# Altium PCB PCB1.PcbDoc (part 2 of 2)
Units mm, origin at the board's own origin, x right, y up, seen from the top; angles counter-clockwise.
Board outline 152.4 x 101.6 mm, 2 copper layers (Top Layer, Bottom Layer); 142 components, 437 nets, 1185 pads, 0 vias.
Unrouted connection lines stored in the file: 722.
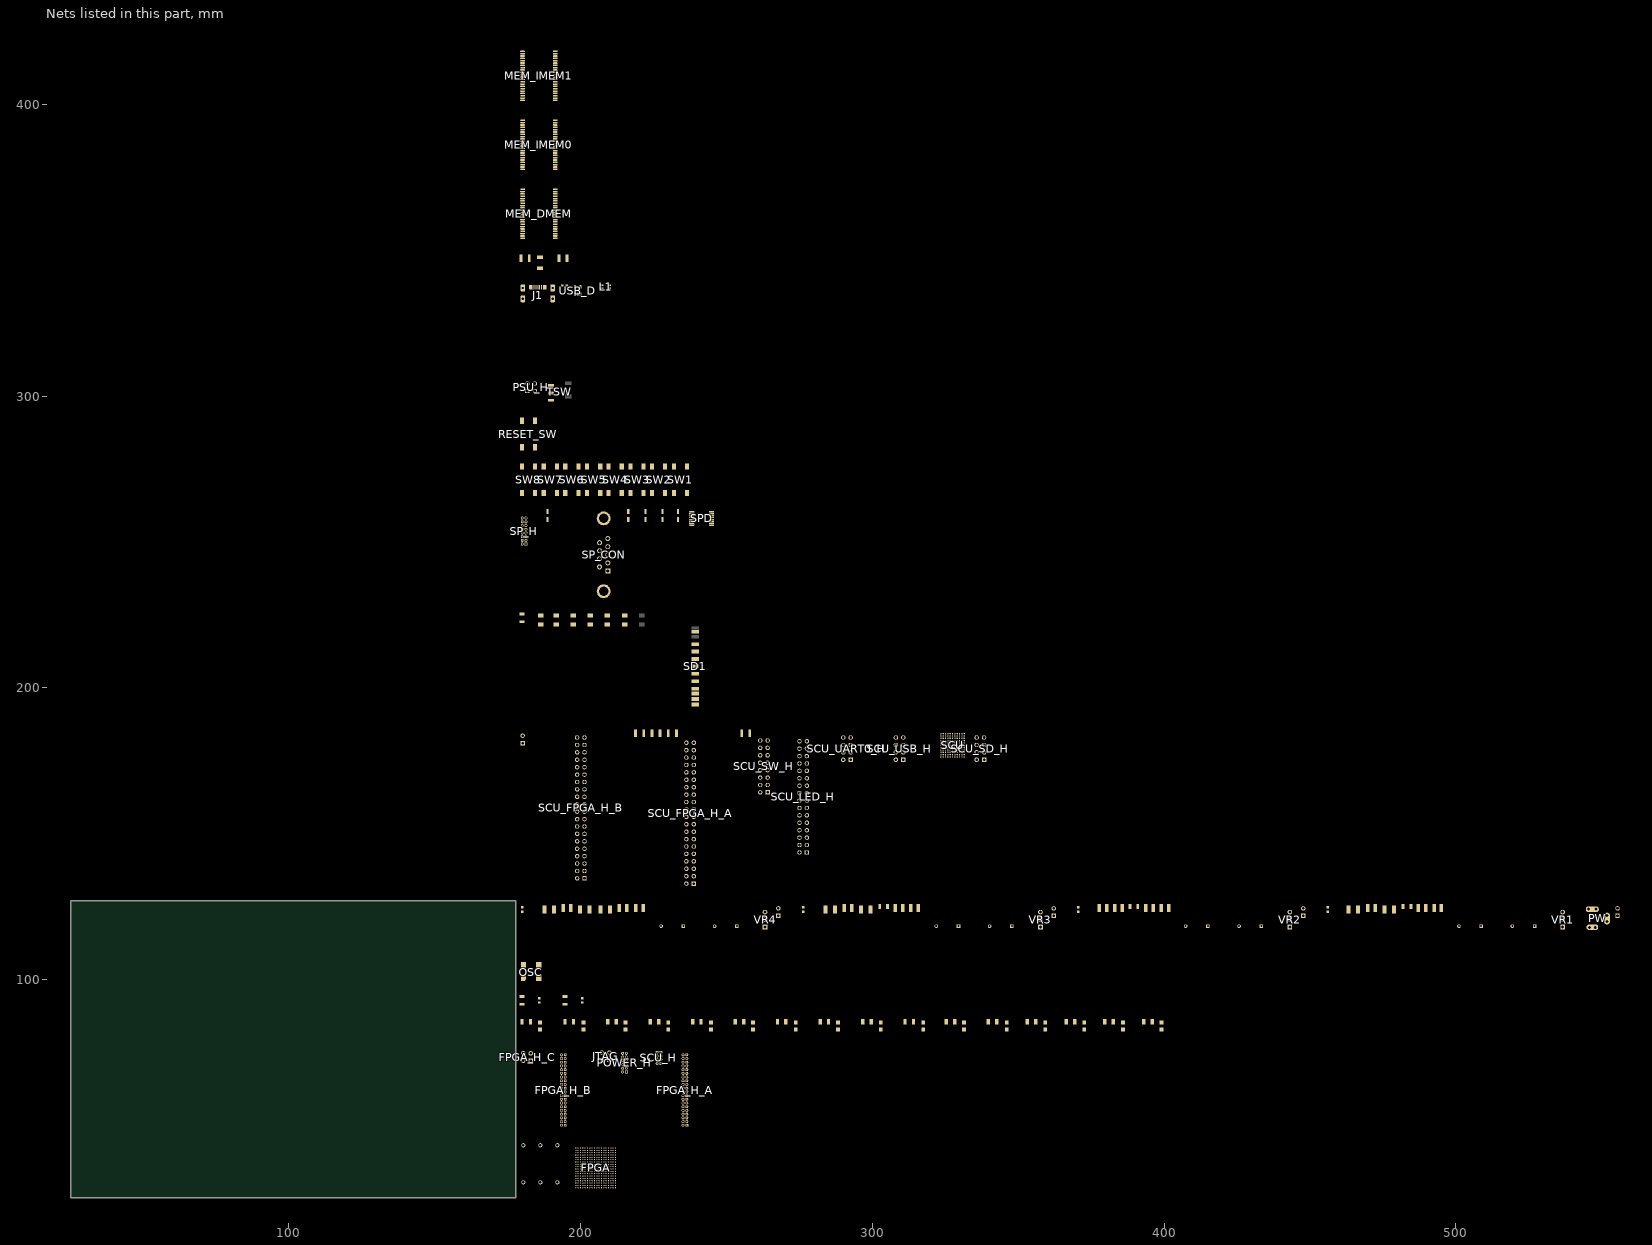
[diagram p2: the nets of this part, all layers, seen from the top]

## Part data
C1 C2 C3 C4 C5 C6 C7 C8 C9 C10 C11 C12 C13: library part CMP-1038-01663-1, "CAP 100nF 100V ±5% 1210 (3225 Metric) Thickness 1.05mm SMD"
C14 C15: library part CMP-1038-00186-1, "CAP 100pF 100V ±1% 1210 (3225 Metric) Thickness 1mm SMD"
C16 C17 C18 C19: library part CMP-1038-00005-1, "CAP 10pF 100V ±0.25pF 1210 (3225 Metric) Thickness 1mm SMD"
CP1 CP2 CP3 CP4 CP5: library part CAP_POL_SIZE_B, "size B series S type V capacitor, panasonic elec"
E1 E2 E3 E4 E5 E6 E7 E8: "Polarized Capacitor (Radial)"
FPGA: "Spartan-6 LX 1.2V FPGA, 218 User I/Os, 324-Ball Chip-Scale BGA (0.8mm Pitch), Speed Grade 2, Industrial Grade, Pb-Free"
FPGA_H_A FPGA_H_B SCU_FPGA_H_A SCU_FPGA_H_B: "Header, 20-Pin, Dual row"
FPGA_H_C JTAG PSU_H: "Header, 2-Pin, Dual row"
J1: library part USB_Micro_TypeB_FCI, "Connector SMD-THD USB Micro Type B middle mount"
L1: library part "WE-CNSW 1206, 744232161", "SMD Common Mode Noise Suppressor WE-CNSW,  Z= 160 Ohm"
L2: library part "WE-CBF 0603, 742792641", "SMD EMI Suppression Ferrite Beads WE-CBF, Z= 300 Ohm"
LED1 LED2 LED3 LED4 LED21 LED22: "High Performance Chip LED, Red"
LED5 LED6 LED7 LED8 LED9 LED10 LED11 LED12 LED13 LED14 LED15 LED16 LED17 LED18 LED19 LED20: "Surface Mount Chip LED, Green"
POWER_H: "Header, 6-Pin, Dual row"
PW: library part PWR2.5, "Low Voltage Power Supply Connector"
PW_H1 PW_H2 PW_H3 PW_H4 SCU_FPGA_H_C: "Header, 2-Pin"
R1 R2 R5 R6 R8 R9 R10: library part CMP-1015-00405-1, "120R 0.5W 1% 1210 (3225 Metric)  SMD"
R3 R4 R7 R37 R38: library part CMP-1014-00056-1, "180R 0.25W 5% 1206 (3216 Metric)  SMD"
R11 R12 R13 R14 R15 R16 R17 R18 R19 R20 R21 R22 R23 R24 R25 R26: library part CMP-1014-00044-1, "56R 0.25W 5% 1206 (3216 Metric)  SMD"
R26 R27 R28 R29 R30 R31 R32: library part CMP-1014-00702-1, "49K9 0.25W 1% 1206 (3216 Metric)  SMD"
R33: library part CMP-1014-00736-1, "100K 0.25W 1% 1206 (3216 Metric)  SMD"
R34 R35 R36: "Semiconductor Resistor"
RESET_SW SW1 SW2 SW3 SW4 SW5 SW6 SW7 SW8: library part switch-button
SCU: library part CMP-0270-00014-1, "EFM32 Giant Gecko, M3 ARM Cortex CPU, 1024 KB Flash, 128 KB RAM, 1.85 - 3.8 V Supply, 48 MHz Max Speed, -40 to 85 degC, 112-Pin BGA, RoHS Compliant"
SCU_H SCU_SD_H SCU_UART0_H SCU_USB_H: "Header, 4-Pin, Dual row"
SCU_LED_H: "Header, 16-Pin, Dual row"
SCU_SW_H SP_H: "Header, 8-Pin, Dual row"
SP_CON: "Receptacle Assembly, 9 Position, Right Angle"
SPD: library part CMP-0299-01177-1, "3-V to 5.5-V Multichannel RS-232 Line Driver / Receiver with ±15-kV ESD Protection, 0 to 70 degC, 16-Pin SSOP (DB), Green (RoHS & no Sb/Br)"
USB_D: library part WE-TVS-HS,SOT23-5L,824011, "TVS Diode WE-TVS-HS, VRWM=5V"
VR1 VR2 VR3 VR4: "5A Low Dropout Positive Regulators, 3-pin TO-220"

## Nets (pads, with @x,y where several pads share a name; then routed paths per layer and width w, separated by ;. In a path a pad name is that pad's centre, name@x,y a point inside that pad or via, vN(x,y) a via of type N, cw(c..) or ccw(c..) an arc to the next point about the centre after c; other vN are vias at no path point)
1.2V: C12.2 C13.2 E8.1 FPGA.G7 FPGA.H9 FPGA.H11 FPGA.J8 FPGA.J10 FPGA.K9 FPGA.K11 FPGA.L8 FPGA.L10 FPGA.M7 FPGA.M12 POWER_H.11 R8.2 R10.2 VR4.2
2.5V: C9.2 C10.2 E6.1 R5.2 R7.1 VR3.2
3,3V: SD1.4 SD1.11
3.3V: C5.2 C6.2 C7.2 CP4.2 E4.1 FPGA.B1 FPGA.B5 FPGA.B10 FPGA.B15 FPGA.B17 FPGA.D7 FPGA.D13 FPGA.E2 FPGA.E5 FPGA.E9 FPGA.E10 FPGA.E14 FPGA.E17 FPGA.G4 FPGA.G10 FPGA.G15 FPGA.J2 FPGA.J5 FPGA.J12 FPGA.J14 FPGA.J17 FPGA.K7 FPGA.M4 FPGA.M9 FPGA.M15 FPGA.P5 FPGA.P9 FPGA.P10 FPGA.P14 FPGA.R2 FPGA.R6 FPGA.R12 FPGA.R17 FPGA.U4 FPGA.U9 FPGA.U14 MEM_DMEM.11 MEM_DMEM.33 MEM_IMEM0.11 MEM_IMEM0.33 MEM_IMEM1.11 MEM_IMEM1.33 OSC.1 OSC.4 POWER_H.6 POWER_H.8 POWER_H.10 POWER_H.12 R4.1 R34.2 R35.1 R36.1 R37.1 R38.1 RESET_SW.3 RESET_SW.4 SCU.D5 SCU.D7 SCU.F8 SCU.G4 SCU.G8 SCU.H7 SCU.K8 SCU.K9 SCU.L4 SCU.L10 VR2.2
5.0V: C2.2 C3.2 E2.1 POWER_H.4 R1.2 R3.1 VR1.2
12.0V: POWER_H.2 PSU_H.3 PW_H1.1 PW_H2.1 PW_H3.1 PW_H4.1
BOOT.RX: SCU.B3 SCU_H.2
BOOT.TX: SCU.C3 SCU_H.1
CLK: FPGA.D9 FPGA.R10 OSC.3
DATA_MEM.ADDR0: FPGA.N4 MEM_DMEM.5
DATA_MEM.ADDR1: FPGA.N3 MEM_DMEM.4
DATA_MEM.ADDR2: FPGA.P4 MEM_DMEM.3
DATA_MEM.ADDR3: FPGA.P3 MEM_DMEM.2
DATA_MEM.ADDR4: FPGA.L6 MEM_DMEM.1
DATA_MEM.ADDR5: FPGA.M5 MEM_DMEM.44
DATA_MEM.ADDR6: FPGA.U2 MEM_DMEM.43
DATA_MEM.ADDR7: FPGA.U1 MEM_DMEM.42
DATA_MEM.ADDR8: FPGA.T2 MEM_DMEM.28
DATA_MEM.ADDR9: FPGA.T1 MEM_DMEM.27
DATA_MEM.ADDR10: FPGA.P2 MEM_DMEM.26
DATA_MEM.ADDR11: FPGA.P1 MEM_DMEM.25
DATA_MEM.ADDR12: FPGA.N2 MEM_DMEM.24
DATA_MEM.ADDR13: FPGA.N1 MEM_DMEM.23
DATA_MEM.ADDR14: FPGA.M3 MEM_DMEM.22
DATA_MEM.ADDR15: FPGA.M1 MEM_DMEM.21
DATA_MEM.ADDR16: FPGA.L2 MEM_DMEM.20
DATA_MEM.ADDR17: FPGA.L1 MEM_DMEM.19
DATA_MEM.ADDR18: FPGA.K2 MEM_DMEM.18
DATA_MEM.BUS0: FPGA.K1 MEM_DMEM.7
DATA_MEM.BUS1: FPGA.L4 MEM_DMEM.8
DATA_MEM.BUS2: FPGA.L3 MEM_DMEM.9
DATA_MEM.BUS3: FPGA.J3 MEM_DMEM.10
DATA_MEM.BUS4: FPGA.J1 MEM_DMEM.13
DATA_MEM.BUS5: FPGA.H2 MEM_DMEM.14
DATA_MEM.BUS6: FPGA.H1 MEM_DMEM.15
DATA_MEM.BUS7: FPGA.K4 MEM_DMEM.16
DATA_MEM.BUS8: FPGA.K3 MEM_DMEM.29
DATA_MEM.BUS9: FPGA.L5 MEM_DMEM.30
DATA_MEM.BUS10: FPGA.K5 MEM_DMEM.31
DATA_MEM.BUS11: FPGA.H4 MEM_DMEM.32
DATA_MEM.BUS12: FPGA.H3 MEM_DMEM.35
DATA_MEM.BUS13: FPGA.L7 MEM_DMEM.36
DATA_MEM.BUS14: FPGA.K6 MEM_DMEM.37
DATA_MEM.BUS15: FPGA.G3 MEM_DMEM.38
DATA_MEM.ENABLE: FPGA.J7 MEM_DMEM.6 MEM_DMEM.17
DATA_MEM.WRITE: FPGA.G1
FPGA.ADDR0: FPGA.B2 SCU_FPGA_H_A.2
FPGA.ADDR1: FPGA.A2 SCU_FPGA_H_A.4
FPGA.ADDR2: FPGA.D6 SCU_FPGA_H_A.6
FPGA.ADDR3: FPGA.C6 SCU_FPGA_H_A.8
FPGA.ADDR4: FPGA.B3 SCU_FPGA_H_A.10
FPGA.ADDR5: FPGA.A3 SCU_FPGA_H_A.12
FPGA.ADDR6: FPGA.B4 SCU_FPGA_H_A.14
FPGA.ADDR7: FPGA.A4 SCU_FPGA_H_A.16
FPGA.ADDR8: FPGA.C5 SCU_FPGA_H_A.18
FPGA.ADDR9: FPGA.A5 SCU_FPGA_H_A.20
FPGA.ADDR10: FPGA.B6 SCU_FPGA_H_A.22
FPGA.ADDR11: FPGA.C7 SCU_FPGA_H_A.24
FPGA.ADDR12: FPGA.A7 SCU_FPGA_H_A.26
FPGA.ADDR13: FPGA.D8 SCU_FPGA_H_A.28
FPGA.ADDR14: FPGA.C8 SCU_FPGA_H_A.30
FPGA.ADDR15: FPGA.B8 SCU_FPGA_H_A.32
FPGA.ADDR16: FPGA.A8 SCU_FPGA_H_A.34
FPGA.ADDR17: FPGA.G9 SCU_FPGA_H_A.36
FPGA.ADDR18: FPGA.B11 SCU_FPGA_H_A.38
FPGA.ADDR19: FPGA.A11 SCU_FPGA_H_A.40
FPGA.BUS0: FPGA.U15 SCU_FPGA_H_B.2
FPGA.BUS1: FPGA.V15 SCU_FPGA_H_B.4
FPGA.BUS2: FPGA.M11 SCU_FPGA_H_B.6
FPGA.BUS3: FPGA.N11 SCU_FPGA_H_B.8
FPGA.BUS4: FPGA.R11 SCU_FPGA_H_B.10
FPGA.BUS5: FPGA.T12 SCU_FPGA_H_B.12
FPGA.BUS6: FPGA.V12 SCU_FPGA_H_B.14
FPGA.BUS7: FPGA.N10 SCU_FPGA_H_B.16
FPGA.BUS8: FPGA.P11 SCU_FPGA_H_B.18
FPGA.BUS9: FPGA.M10 SCU_FPGA_H_B.20
FPGA.BUS10: FPGA.N9 SCU_FPGA_H_B.22
FPGA.BUS11: FPGA.U11 SCU_FPGA_H_B.24
FPGA.BUS12: FPGA.V11 SCU_FPGA_H_B.26
FPGA.BUS13: FPGA.M8 SCU_FPGA_H_B.28
FPGA.BUS14: FPGA.N8 SCU_FPGA_H_B.30
FPGA.BUS15: FPGA.U8 SCU_FPGA_H_B.32
FPGA.ENABLE: SCU_FPGA_H_B.36
FPGA.STATE0: FPGA.U7 SCU_FPGA_H_B.38
FPGA.STATE1: FPGA.V7 SCU_FPGA_H_B.40
FPGA.STATE2: FPGA.N7 SCU_FPGA_H_C.2
FPGA.WRITE: FPGA.P8 FPGA.T6 SCU_FPGA_H_B.34
FPGA_HEADER0: FPGA.D4 FPGA_H_A.1
FPGA_HEADER1: FPGA.C4 FPGA_H_A.2
FPGA_HEADER2: FPGA.A6 FPGA_H_A.3
FPGA_HEADER3: FPGA.C9 FPGA_H_A.4
FPGA_HEADER4: FPGA.B9 FPGA_H_A.5
FPGA_HEADER5: FPGA.A9 FPGA_H_A.6
FPGA_HEADER6: FPGA.D11 FPGA_H_A.7
FPGA_HEADER7: FPGA.C11 FPGA_H_A.8
FPGA_HEADER8: FPGA.C10 FPGA_H_A.9
FPGA_HEADER9: FPGA.A10 FPGA_H_A.10
FPGA_HEADER10: FPGA.F9 FPGA_H_A.11
FPGA_HEADER11: FPGA.B12 FPGA_H_A.12
FPGA_HEADER12: FPGA.A12 FPGA_H_A.13
FPGA_HEADER13: FPGA.C13 FPGA_H_A.14
FPGA_HEADER14: FPGA.A13 FPGA_H_A.15
FPGA_HEADER15: FPGA.B14 FPGA_H_A.16
FPGA_HEADER16: FPGA.A14 FPGA_H_A.17
FPGA_HEADER17: FPGA.F13 FPGA_H_A.18
FPGA_HEADER18: FPGA.E13 FPGA_H_A.19
FPGA_HEADER19: FPGA.C15 FPGA_H_A.20
FPGA_HEADER20: FPGA.A15 FPGA_H_A.21
FPGA_HEADER21: FPGA.D14 FPGA_H_A.22
FPGA_HEADER22: FPGA.C14 FPGA_H_A.23
FPGA_HEADER23: FPGA.B16 FPGA_H_A.24
FPGA_HEADER24: FPGA.A16 FPGA_H_A.25
FPGA_HEADER25: FPGA.M13 FPGA_H_A.26
FPGA_HEADER26: FPGA.P15 FPGA_H_A.27
FPGA_HEADER27: FPGA.P16 FPGA_H_A.28
FPGA_HEADER28: FPGA.R15 FPGA_H_A.29
FPGA_HEADER29: FPGA.T15 FPGA_H_A.30
FPGA_HEADER30: FPGA.U16 FPGA_H_A.31
FPGA_HEADER31: FPGA.V16 FPGA_H_A.32
FPGA_HEADER32: FPGA.R13 FPGA_H_A.33
FPGA_HEADER33: FPGA.T13 FPGA_H_A.34
FPGA_HEADER34: FPGA.T14 FPGA_H_A.35
FPGA_HEADER35: FPGA.V14 FPGA_H_A.36
FPGA_HEADER36: FPGA.N12 FPGA_H_A.37
FPGA_HEADER37: FPGA.P12 FPGA_H_A.38
FPGA_HEADER38: FPGA.U13 FPGA_H_A.39
FPGA_HEADER39: FPGA.V13 FPGA_H_A.40
FPGA_HEADER40: FPGA.T11 FPGA_H_B.1
FPGA_HEADER41: FPGA.T10 FPGA_H_B.2
FPGA_HEADER42: FPGA.U10 FPGA_H_B.3
FPGA_HEADER43: FPGA.V10 FPGA_H_B.4
FPGA_HEADER44: FPGA.R8 FPGA_H_B.5
FPGA_HEADER45: FPGA.T8 FPGA_H_B.6
FPGA_HEADER46: FPGA.T9 FPGA_H_B.7
FPGA_HEADER47: FPGA.V9 FPGA_H_B.8
FPGA_HEADER48: FPGA.V8 FPGA_H_B.9
FPGA_HEADER49: FPGA.V6 FPGA_H_B.10
FPGA_HEADER50: FPGA.R7 FPGA_H_B.11
FPGA_HEADER51: FPGA.T7 FPGA_H_B.12
FPGA_HEADER52: FPGA.N6 FPGA_H_B.13
FPGA_HEADER53: FPGA.P7 FPGA_H_B.14
FPGA_HEADER54: FPGA.R5 FPGA_H_B.15
FPGA_HEADER55: FPGA.T5 FPGA_H_B.16
FPGA_HEADER56: FPGA.U5 FPGA_H_B.17
FPGA_HEADER57: FPGA.V5 FPGA_H_B.18
FPGA_HEADER58: FPGA.R3 FPGA_H_B.19
FPGA_HEADER59: FPGA.T3 FPGA_H_B.20
FPGA_HEADER60: FPGA.T4 FPGA_H_B.21
FPGA_HEADER61: FPGA.V4 FPGA_H_B.22
FPGA_HEADER62: FPGA.N5 FPGA_H_B.23
FPGA_HEADER63: FPGA.P6 FPGA_H_B.24
FPGA_HEADER64: FPGA.V3 FPGA_H_B.25
FPGA_HEADER65: FPGA.J6 FPGA_H_B.26
FPGA_HEADER66: FPGA.F2 FPGA_H_B.27
FPGA_HEADER67: FPGA.F1 FPGA_H_B.28
FPGA_HEADER68: FPGA.H6 FPGA_H_B.29
FPGA_HEADER69: FPGA.H5 FPGA_H_B.30
FPGA_HEADER70: FPGA.E3 FPGA_H_B.31
FPGA_HEADER71: FPGA.E1 FPGA_H_B.32
FPGA_HEADER72: FPGA.F4 FPGA_H_B.33
FPGA_HEADER73: FPGA.F3 FPGA_H_B.34
FPGA_HEADER74: FPGA.D2 FPGA_H_B.35
FPGA_HEADER75: FPGA.D1 FPGA_H_B.36
FPGA_HEADER76: FPGA.H7 FPGA_H_B.37
FPGA_HEADER77: FPGA.G6 FPGA_H_B.38
FPGA_HEADER78: FPGA.E4 FPGA_H_B.39
FPGA_HEADER79: FPGA.D3 FPGA_H_B.40
FPGA_HEADER80: FPGA.F6 FPGA_H_C.1
FPGA_HEADER81: FPGA.F5 FPGA_H_C.2
FPGA_HEADER82: FPGA.C2 FPGA_H_C.3
FPGA_HEADER83: FPGA.C1
FPGA_INST_ENABLE: FPGA.L14 MEM_IMEM0.6 MEM_IMEM0.17 MEM_IMEM1.6 MEM_IMEM1.17
FPGA_INST_WRITE: FPGA.N14
FPGA_INSTADDR0: FPGA.F15 MEM_IMEM0.5 MEM_IMEM1.5
FPGA_INSTADDR1: FPGA.F16 MEM_IMEM0.4 MEM_IMEM1.4
FPGA_INSTADDR2: FPGA.C17 MEM_IMEM0.3 MEM_IMEM1.3
FPGA_INSTADDR3: FPGA.C18 MEM_IMEM0.2 MEM_IMEM1.2
FPGA_INSTADDR4: FPGA.F14 MEM_IMEM0.1 MEM_IMEM1.1
FPGA_INSTADDR5: FPGA.G14 MEM_IMEM0.44 MEM_IMEM1.44
FPGA_INSTADDR6: FPGA.D17 MEM_IMEM0.43 MEM_IMEM1.43
FPGA_INSTADDR7: FPGA.D18 MEM_IMEM0.42 MEM_IMEM1.42
FPGA_INSTADDR8: FPGA.H12 MEM_IMEM0.28 MEM_IMEM1.28
FPGA_INSTADDR9: FPGA.G13 MEM_IMEM0.27 MEM_IMEM1.27
FPGA_INSTADDR10: FPGA.E16 MEM_IMEM0.26 MEM_IMEM1.26
FPGA_INSTADDR11: FPGA.E18 MEM_IMEM0.25 MEM_IMEM1.25
FPGA_INSTADDR12: FPGA.K12 MEM_IMEM0.24 MEM_IMEM1.24
FPGA_INSTADDR13: FPGA.K13 MEM_IMEM0.23 MEM_IMEM1.23
FPGA_INSTADDR14: FPGA.F17 MEM_IMEM0.22 MEM_IMEM1.22
FPGA_INSTADDR15: FPGA.F18 MEM_IMEM0.21 MEM_IMEM1.21
FPGA_INSTADDR16: FPGA.H13 MEM_IMEM0.20 MEM_IMEM1.20
FPGA_INSTADDR17: FPGA.H14 MEM_IMEM0.19 MEM_IMEM1.19
FPGA_INSTADDR18: FPGA.H15 MEM_IMEM0.18 MEM_IMEM1.18
GND: C1.1 C2.1 C3.1 C4.1 C5.1 C6.1 C7.1 C8.1 C9.1 C10.1 C11.1 C12.1 C13.1 C14.2 C15.1 C16.2 C17.2 C18.2 C19.2 CP3.1 CP5.2 E1.2 E2.2 E3.2 E4.2 E5.2 E6.2 E7.2 E8.2 FPGA.A1 FPGA.A18 FPGA.B7 FPGA.B13 FPGA.C3 FPGA.C16 FPGA.D5 FPGA.D10 FPGA.E15 FPGA.G2 FPGA.G5 FPGA.G12 FPGA.G17 FPGA.H8 FPGA.H10 FPGA.J4 FPGA.J9 FPGA.J11 FPGA.J15 FPGA.K8 FPGA.K10 FPGA.L9 FPGA.L11 FPGA.M2 FPGA.M6 FPGA.M17 FPGA.N13 FPGA.P13 FPGA.R1 FPGA.R4 FPGA.R9 FPGA.R14 FPGA.R16 FPGA.R18 FPGA.T16 FPGA.U6 FPGA.U12 FPGA.V1 FPGA.V18 FPGA_H_C.4 J1.5 LED1.2 LED2.2 LED3.2 LED4.2 LED5.2 LED6.2 LED7.2 LED8.2 LED9.2 LED10.2 LED11.2 LED12.2 LED13.2 LED14.2 LED15.2 LED16.2 LED17.2 LED18.2 LED19.2 LED20.2 LED21.2 LED22.2 MEM_DMEM.12 MEM_DMEM.34 MEM_DMEM.39 MEM_DMEM.40 MEM_DMEM.41 MEM_IMEM0.12 MEM_IMEM0.34 MEM_IMEM0.39 MEM_IMEM0.40 MEM_IMEM0.41 MEM_IMEM1.12 MEM_IMEM1.34 MEM_IMEM1.39 MEM_IMEM1.40 MEM_IMEM1.41 OSC.2 POWER_H.1 POWER_H.3 POWER_H.5 POWER_H.7 POWER_H.9 PW.2 PW.2A PW.2B R2.1 R6.1 R9.1 R27.2 R28.2 R30.2 R32.2 R33.2 SCU.C7 SCU.D4 SCU.F9 SCU.G3 SCU.G9 SCU.H6 SCU.K4 SCU.K7 SCU.K10 SCU.L7 SP_CON.5 SP_CON.10 SP_CON.11 SP_H.1 SP_H.3 SP_H.13 SP_H.15 SPD.15 SW1.3 SW1.4 SW2.3 SW2.4 SW3.3 SW3.4 SW4.3 SW4.4 SW5.3 SW5.4 SW6.3 SW6.4 SW7.3 SW7.4 SW8.3 SW8.4 USB_D.2 VR2.1
H_BTN0: SCU.E4 SCU_SW_H.1
H_BTN1: SCU.F1 SCU_SW_H.3
H_BTN2: SCU.F2 SCU_SW_H.5
H_BTN3: SCU.F3 SCU_SW_H.7
H_BTN4: SCU.F4 SCU_SW_H.9
H_BTN5: SCU.G1 SCU_SW_H.11
H_BTN6: SCU.G2 SCU_SW_H.13
H_BTN7: SCU.K1 SCU_SW_H.15
H_FPGA_ADDR0: SCU.H1 SCU_FPGA_H_A.1
H_FPGA_ADDR1: SCU.J1 SCU_FPGA_H_A.3
H_FPGA_ADDR2: SCU.H2 SCU_FPGA_H_A.5
H_FPGA_ADDR3: SCU.J2 SCU_FPGA_H_A.7
H_FPGA_ADDR4: SCU.K2 SCU_FPGA_H_A.9
H_FPGA_ADDR5: SCU.L2 SCU_FPGA_H_A.11
H_FPGA_ADDR6: SCU.G10 SCU_FPGA_H_A.13
H_FPGA_ADDR7: SCU.G11 SCU_FPGA_H_A.15
H_FPGA_ADDR8: SCU.D10 SCU_FPGA_H_A.17
H_FPGA_ADDR9: SCU.D11 SCU_FPGA_H_A.19
H_FPGA_ADDR10: SCU.C10 SCU_FPGA_H_A.21
H_FPGA_ADDR11: SCU.C11 SCU_FPGA_H_A.23
H_FPGA_ADDR12: SCU.E9 SCU_FPGA_H_A.25
H_FPGA_ADDR13: SCU.E10 SCU_FPGA_H_A.27
H_FPGA_ADDR14: SCU.F10 SCU_FPGA_H_A.29
H_FPGA_ADDR15: SCU.E11 SCU_FPGA_H_A.31
H_FPGA_ADDR16: SCU.A9 SCU_FPGA_H_A.33
H_FPGA_ADDR17: SCU.B9 SCU_FPGA_H_A.35
H_FPGA_ADDR18: SCU.C9 SCU_FPGA_H_A.37
H_FPGA_ADDR19: SCU.D9 SCU_FPGA_H_A.39
H_FPGA_BUS0: SCU.C2 SCU_FPGA_H_B.1
H_FPGA_BUS1: SCU.C1 SCU_FPGA_H_B.3
H_FPGA_BUS2: SCU.D2 SCU_FPGA_H_B.5
H_FPGA_BUS3: SCU.D1 SCU_FPGA_H_B.7
H_FPGA_BUS4: SCU.E3 SCU_FPGA_H_B.9
H_FPGA_BUS5: SCU.E2 SCU_FPGA_H_B.11
H_FPGA_BUS6: SCU.E1 SCU_FPGA_H_B.13
H_FPGA_BUS7: SCU.H4 SCU_FPGA_H_B.15
H_FPGA_BUS8: SCU.H5 SCU_FPGA_H_B.17
H_FPGA_BUS9: SCU.J5 SCU_FPGA_H_B.19
H_FPGA_BUS10: SCU.J6 SCU_FPGA_H_B.21
H_FPGA_BUS11: SCU.K5 SCU_FPGA_H_B.23
H_FPGA_BUS12: SCU.J4 SCU_FPGA_H_B.25
H_FPGA_BUS13: SCU.K3 SCU_FPGA_H_B.27
H_FPGA_BUS14: SCU.L3 SCU_FPGA_H_B.29
H_FPGA_BUS15: SCU.B1 SCU_FPGA_H_B.31
H_FPGA_ENABLE: SCU.A4 SCU_FPGA_H_B.35
H_FPGA_STATE_0: SCU.C4 SCU_FPGA_H_B.37
H_FPGA_STATE_1: SCU.H3 SCU_FPGA_H_B.39
H_FPGA_STATE_2: SCU.J3 SCU_FPGA_H_C.1
H_FPGA_WRITE: SCU.B4 SCU_FPGA_H_B.33
H_LED0: SCU.L1 SCU_LED_H.1
H_LED1: SCU.L5 SCU_LED_H.3
H_LED2: SCU.L6 SCU_LED_H.5
H_LED3: SCU.D3 SCU_LED_H.7
H_LED4: SCU.L11 SCU_LED_H.9
H_LED5: SCU.J9 SCU_LED_H.11
H_LED6: SCU.J10 SCU_LED_H.13
H_LED7: SCU.J11 SCU_LED_H.15
H_LED8: SCU.H9 SCU_LED_H.17
H_LED9: SCU.H10 SCU_LED_H.19
H_LED10: SCU.H11 SCU_LED_H.21
H_LED11: SCU.H8 SCU_LED_H.23
H_LED12: SCU.D6 SCU_LED_H.25
H_LED13: SCU.A5 SCU_LED_H.27
H_LED14: SCU.B5 SCU_LED_H.29
H_LED15: SCU.C5 SCU_LED_H.31
H_SD_CLK: SCU.B2 SCU_SD_H.3
H_SD_CS: SCU.A3 SCU_SD_H.1
H_SD_DI: SCU.A1 SCU_SD_H.7
H_SD_DO: SCU.A2 SCU_SD_H.5
H_U0_CTRL_RX: SCU.C6 SCU_UART0_H.7
H_U0_CTRL_TX: SCU.B6 SCU_UART0_H.5
H_U0_RX: SCU.A6 SCU_UART0_H.3
H_U0_TX: SCU.B7 SCU_UART0_H.1
H_USB_DM: SCU.A10 SCU_USB_H.3
H_USB_DP: SCU.A11 SCU_USB_H.5
H_USB_ID: SCU.A8 SCU_USB_H.7
H_USB_VBUS_ENABLE: SCU.A7 SCU_USB_H.1
HEADER.DBG_SWCLK: SCU.E8 SCU_H.6
HEADER.DBG_SWDIO: SCU.D8 SCU_H.7
HEADER.DBG_SWO: SCU.C8 SCU_H.8
HEADER.USB_DM_PULLUP: SCU.K11 SCU_H.5
HFXTAL.N: C15.2 SCU.L9 XTAL.1
HFXTAL.P: C14.1 SCU.L8 XTAL.2
INIT: FPGA.U3 R36.2
INST_MEM0.BUS0: FPGA.H16 MEM_IMEM0.7
INST_MEM0.BUS1: FPGA.G16 MEM_IMEM0.8
INST_MEM0.BUS2: FPGA.G18 MEM_IMEM0.9
INST_MEM0.BUS3: FPGA.J13 MEM_IMEM0.10
INST_MEM0.BUS4: FPGA.K14 MEM_IMEM0.13
INST_MEM0.BUS5: FPGA.L12 MEM_IMEM0.14
INST_MEM0.BUS6: FPGA.L13 MEM_IMEM0.15
INST_MEM0.BUS7: FPGA.K15 MEM_IMEM0.16
INST_MEM0.BUS8: FPGA.K16 MEM_IMEM0.29
INST_MEM0.BUS9: FPGA.L15 MEM_IMEM0.30
INST_MEM0.BUS10: FPGA.L16 MEM_IMEM0.31
INST_MEM0.BUS11: FPGA.H17 MEM_IMEM0.32
INST_MEM0.BUS12: FPGA.H18 MEM_IMEM0.35
INST_MEM0.BUS13: FPGA.J16 MEM_IMEM0.36
INST_MEM0.BUS14: FPGA.J18 MEM_IMEM0.37
INST_MEM0.BUS15: FPGA.K17 MEM_IMEM0.38
INST_MEM1.BUS0: FPGA.K18 MEM_IMEM1.7
INST_MEM1.BUS1: FPGA.L17 MEM_IMEM1.8
INST_MEM1.BUS2: FPGA.L18 MEM_IMEM1.9
INST_MEM1.BUS3: FPGA.M16 MEM_IMEM1.10
INST_MEM1.BUS4: FPGA.M18 MEM_IMEM1.13
INST_MEM1.BUS5: FPGA.N17 MEM_IMEM1.14
INST_MEM1.BUS6: FPGA.N18 MEM_IMEM1.15
INST_MEM1.BUS7: FPGA.P17 MEM_IMEM1.16
INST_MEM1.BUS8: FPGA.P18 MEM_IMEM1.29
INST_MEM1.BUS9: FPGA.N15 MEM_IMEM1.30
INST_MEM1.BUS10: FPGA.N16 MEM_IMEM1.31
INST_MEM1.BUS11: FPGA.T17 MEM_IMEM1.32
INST_MEM1.BUS12: FPGA.T18 MEM_IMEM1.35
INST_MEM1.BUS13: FPGA.U17 MEM_IMEM1.36
INST_MEM1.BUS14: FPGA.U18 MEM_IMEM1.37
INST_MEM1.BUS15: FPGA.M14 MEM_IMEM1.38
JTAG.TCK: FPGA.A17 JTAG.1
JTAG.TDI: FPGA.D15 JTAG.3
JTAG.TDO: FPGA.D16 JTAG.2
JTAG.TMS: FPGA.B18 JTAG.4
LED0: R11.1 SCU_LED_H.2
LED1: R12.1 SCU_LED_H.4
LED2: R13.1 SCU_LED_H.6
LED3: R14.1 SCU_LED_H.8
LED4: R15.1 SCU_LED_H.10
LED5: R16.1 SCU_LED_H.12
LED6: R17.1 SCU_LED_H.14
LED7: R18.1 SCU_LED_H.16
LED8: R19.1 SCU_LED_H.18
LED9: R20.1 SCU_LED_H.20
LED10: R21.1 SCU_LED_H.22
LED11: R22.1 SCU_LED_H.24
LED12: R23.1 SCU_LED_H.26
LED13: R24.1 SCU_LED_H.28
LED14: R25.1 SCU_LED_H.30
LED15: SCU_LED_H.32
NetC1_2: C1.2 E1.1 PW_H1.2 VR1.3
NetC4_2: C4.2 E3.1 PW_H2.2 VR2.3
NetC8_2: C8.2 E5.1 PW_H3.2 VR3.3
NetC11_2: C11.2 E7.1 PW_H4.2 VR4.3
NetC16_1: C16.1 SCU.F11
NetC17_1: C17.1 SCU.B10
NetC18_1: C18.1 SCU.B8
NetC19_1: C19.1 SCU.B11
NetCP1_1: CP1.1 SPD.1
NetCP1_2: CP1.2 SPD.3
NetCP2_1: CP2.1 SPD.4
NetCP2_2: CP2.2 SPD.5
NetCP3_2: CP3.2 SPD.6
NetCP4_1: CP4.1 SPD.2
NetCP5_1: CP5.1 SPD.16
NetFPGA_C12: FPGA.C12
NetFPGA_D12: FPGA.D12
NetFPGA_E6: FPGA.E6
NetFPGA_E7: FPGA.E7
NetFPGA_E8: FPGA.E8
NetFPGA_E11: FPGA.E11
NetFPGA_E12: FPGA.E12
NetFPGA_F7: FPGA.F7
NetFPGA_F8: FPGA.F8
NetFPGA_F10: FPGA.F10
NetFPGA_F11: FPGA.F11
NetFPGA_F12: FPGA.F12
NetFPGA_G8: FPGA.G8
NetFPGA_G11: FPGA.G11
NetFPGA_V2: FPGA.V2 R34.1
NetFPGA_V17: FPGA.V17 R35.2
NetJ1_1: J1.1 L2.1 USB_D.5
NetJ1_2: J1.2 L1.3 USB_D.4
NetJ1_3: J1.3 L1.2 USB_D.3
NetJ1_4: J1.4
NetJ1_SH: J1.SH
NetLED1_1: LED1.1 R3.2
NetLED2_1: LED2.1 R4.2
NetLED3_1: LED3.1 R7.2
NetLED4_1: LED4.1 R10.1
NetLED5_1: LED5.1 R11.2
NetLED6_1: LED6.1 R12.2
NetLED7_1: LED7.1 R13.2
NetLED8_1: LED8.1 R14.2
NetLED9_1: LED9.1 R15.2
NetLED10_1: LED10.1 R16.2
NetLED11_1: LED11.1 R17.2
NetLED12_1: LED12.1 R18.2
NetLED13_1: LED13.1 R19.2
NetLED14_1: LED14.1 R20.2
NetLED15_1: LED15.1 R21.2
NetLED16_1: LED16.1 R22.2
NetLED17_1: LED17.1 R23.2
NetLED18_1: LED18.1 R24.2
NetLED19_1: LED19.1 R25.2
NetLED20_1: LED20.1
NetLED21_1: LED21.1 R37.2
NetLED22_1: LED22.1 R38.2
NetPSU_H_2: PSU_H.2 TSW.4 TSW.6
NetPSU_H_4: PSU_H.4 TSW.5
NetR1_1: R1.1 R2.2 VR1.1
NetR5_1: R5.1 R6.2 VR3.1
NetR8_1: R8.1 R9.2 VR4.1
NetR26_2: R26.2@182.933,85.598 SD1.1
NetR27_1: R27.1 SD1.3
NetR28_1: R28.1 SD1.6
NetR29_2: R29.2 SD1.7
NetR30_1: R30.1 SD1.8
NetR31_2: R31.2 SD1.2
NetR32_1: R32.1 SD1.10
NetR33_1: R33.1 SD1.12
NetSP_CON_1: SP_CON.1 SP_H.16
NetSP_CON_2: SP_CON.2 SPD.14
NetSP_CON_3: SP_CON.3 SPD.13
NetSP_CON_4: SP_CON.4 SP_H.4
NetSP_CON_6: SP_CON.6 SP_H.14
NetSP_CON_7: SP_CON.7 SPD.7
NetSP_CON_8: SP_CON.8 SPD.8
NetSP_CON_9: SP_CON.9 SP_H.2
NetSP_H_6: SP_H.6 SPD.9
NetSP_H_8: SP_H.8 SPD.12
NetSP_H_10: SP_H.10 SPD.10
NetSP_H_12: SP_H.12 SPD.11
NetUSB_D_1: USB_D.1
RESETN: RESET_SW.1 RESET_SW.2 SCU.K6
SD.CLK: SCU_SD_H.4 SD1.5
SD.CS: R26.1@180.033,85.598 SCU_SD_H.2
SD.DI: R31.1 SCU_SD_H.8
SD.DO: R29.1 SCU_SD_H.6
SW0: SCU_SW_H.2 SW1.1 SW1.2
SW1: SCU_SW_H.4 SW2.1 SW2.2
SW2: SCU_SW_H.6 SW3.1 SW3.2
SW3: SCU_SW_H.8 SW4.1 SW4.2
SW4: SCU_SW_H.10 SW5.1 SW5.2
SW5: SCU_SW_H.12 SW6.1 SW6.2
SW6: SCU_SW_H.14 SW7.1 SW7.2
SW7: SCU_SW_H.16 SW8.1 SW8.2
"TOGGLE OUT": PSU_H.1 PW.1 PW.1A PW.1B PW.3 PW.3A PW.3B
UART0.CTRL_RX: SCU_UART0_H.8 SP_H.5
UART0.CTRL_TX: SCU_UART0_H.6 SP_H.9
UART0.RX: SCU_UART0_H.4 SP_H.7
UART0.TX: SCU_UART0_H.2 SP_H.11
UART1.RX: SCU.J8 SCU_H.4
UART1.TX: SCU.J7 SCU_H.3
USB.DM: L1.4 SCU_USB_H.4
USB.DP: L1.1 SCU_USB_H.6
USB.ID: SCU_USB_H.8
USB.VBUS_ENABLE: L2.2 SCU_USB_H.2
pads on no net: J1.0 R26.1@220.98,221.716 R26.2@220.98,224.816 SCU.E5 SCU.E6 SCU.E7 SCU.F5 SCU.F6 SCU.F7 SCU.G5 SCU.G6 SCU.G7 SD1.9 SD1.13 TSW.

## Silkscreen, mask and mechanical layers (free items; w line width, h text height)
Top Overlay:
  drawing of 103 lines, arcs and shapes, not listed
  text "Sigve Sebastian Farstad" at 71.015,117.475 h2.3
  text "Fedor Olegovich Fadeev" at 72.252,114.3 h2.3
  text "Bjørn Åge Tungesvik" at 74.708,111.125 h2.3
  text "Odd Magnus Trondrud" at 76.583,107.95 h2.3
  text "BARRICELLI" at 49.53,106.045 h4
  text "Per Thomas Lundal" at 78.553,104.775 h2.3
  text "Torbjørn Langland" at 80.362,101.6 h2.3
  text "Emil Taylor Bye" at 82.251,98.425 h2.3
  text "Eirik Flogard" at 84.675,95.25 h2.3
  text "Rune Holmgren" at 85.979,92.075 h2.3
  text "Péter Gombos" at 87.956,88.9 h2.3
  text "NTNU" at 90.17,65.405 h4
  text "Datamaskinprosjektet" at 73.66,58.42 h2.8
  text "2013" at 83.185,55.88 h2.8

## Text inside footprints (layer, text, board x,y; h text height)
CP1: Top Overlay "+" at 226.187,256.794 h1.52; Top Overlay "-" at 226.187,259.842 h1.52
CP2: Top Overlay "+" at 231.521,256.794 h1.52; Top Overlay "-" at 231.521,259.842 h1.52
CP3: Top Overlay "+" at 220.345,256.794 h1.52; Top Overlay "-" at 220.345,259.842 h1.52
CP4: Top Overlay "+" at 214.503,256.794 h1.52; Top Overlay "-" at 214.503,259.842 h1.52
CP5: Top Overlay "+" at 186.817,256.794 h1.52; Top Overlay "-" at 186.817,259.842 h1.52
E1: Top Overlay "+" at 512.957,117.627 h1.5
E2: Top Overlay "+" at 531.245,117.627 h1.5
E3: Top Overlay "+" at 419.358,117.627 h1.5
E4: Top Overlay "+" at 437.646,117.627 h1.5
E5: Top Overlay "+" at 333.887,117.627 h1.5
E6: Top Overlay "+" at 352.175,117.627 h1.5
E7: Top Overlay "+" at 239.653,117.627 h1.5
E8: Top Overlay "+" at 257.941,117.627 h1.5
FPGA_H_A: Top Overlay "39" at 236.982,75.565 h1 r90; Top Overlay "1" at 236.982,48.565 h1 r90
FPGA_H_B: Top Overlay "39" at 195.326,75.565 h1 r90; Top Overlay "1" at 195.326,48.565 h1 r90
FPGA_H_C: Top Overlay "1" at 183.515,70.231 h1.27 r90; Top Overlay "2" at 180.975,69.723 h1.27 r90; Top Overlay "4" at 180.975,76.327 h1.27 r90; Top Overlay "3" at 183.515,76.327 h1.27 r90
JTAG: Top Overlay "1" at 210.439,70.485 h1.27 r90; Top Overlay "2" at 207.899,69.977 h1.27 r90; Top Overlay "4" at 207.899,76.581 h1.27 r90; Top Overlay "3" at 210.439,76.581 h1.27 r90
POWER_H: Top Overlay "11" at 216.281,76.073 h1 r90; Top Overlay "1" at 216.281,66.929 h1 r90
PSU_H: Top Overlay "1" at 179.832,301.244 h1.27; Top Overlay "2" at 179.324,303.784 h1.27; Top Overlay "4" at 185.928,303.784 h1.27; Top Overlay "3" at 185.928,301.244 h1.27
PW: Mechanical 1 "Mech 2 - Clearance, move to internal plane if present" at 541.669,110.776 h0.3 r90; Mechanical 1 "Mech 1 - Slot cut-out" at 541.169,110.776 h0.3 r90; Mechanical 1 "Assign keep-out area to slot" at 540.169,110.776 h0.3 r90; Mechanical 1 "Alert PCB fab to slot details" at 540.669,110.776 h0.3 r90
SCU_FPGA_H_A: Top Overlay "1" at 239.395,130.429 h1.27 r90; Top Overlay "2" at 236.855,130.429 h1.27 r90; Top Overlay "40" at 236.855,183.261 h1.27 r90; Top Overlay "39" at 239.395,183.261 h1.27 r90
SCU_FPGA_H_B: Top Overlay "1" at 201.93,132.207 h1.27 r90; Top Overlay "2" at 199.39,132.207 h1.27 r90; Top Overlay "40" at 199.39,185.039 h1.27 r90; Top Overlay "39" at 201.93,185.039 h1.27 r90
SCU_H: Top Overlay "1" at 228.092,69.774 h1 r90; Top Overlay "7" at 228.092,76.574 h1 r90
SCU_LED_H: Top Overlay "2" at 275.59,141.097 h1.27 r90; Top Overlay "1" at 278.13,141.097 h1.27 r90; Top Overlay "31" at 278.13,183.261 h1.27 r90; Top Overlay "32" at 275.59,183.261 h1.27 r90
SCU_SD_H: Top Overlay "2" at 336.296,172.847 h1.27 r90; Top Overlay "1" at 338.836,173.355 h1.27 r90; Top Overlay "7" at 338.836,184.531 h1.27 r90; Top Overlay "8" at 336.296,184.531 h1.27 r90
SCU_SW_H: Top Overlay "2" at 262.128,161.671 h1.27 r90; Top Overlay "1" at 264.668,161.671 h1.27 r90; Top Overlay "15" at 264.668,183.515 h1.27 r90; Top Overlay "16" at 262.128,183.515 h1.27 r90
SCU_UART0_H: Top Overlay "2" at 290.576,172.847 h1.27 r90; Top Overlay "1" at 293.116,173.355 h1.27 r90; Top Overlay "7" at 293.116,184.531 h1.27 r90; Top Overlay "8" at 290.576,184.531 h1.27 r90
SCU_USB_H: Top Overlay "2" at 308.61,172.847 h1.27 r90; Top Overlay "1" at 311.15,173.355 h1.27 r90; Top Overlay "7" at 311.15,184.531 h1.27 r90; Top Overlay "8" at 308.61,184.531 h1.27 r90
SP_CON: Top Overlay "6" at 203.476,240.963 h1.5 r90; Top Overlay "9" at 203.476,249.273 h1.5 r90; Top Overlay "5" at 212.876,250.658 h1.5 r90; Top Overlay "1" at 212.876,239.828 h1.5 r90
SP_H: Top Overlay "15" at 181.864,259.461 h1 r90; Top Overlay "1" at 181.864,247.701 h1 r90